# Altium PCB PCB1.PcbDoc (part 1 of 3)
Units mil, origin at the board's own origin, x right, y up, seen from the top; angles counter-clockwise.
Board outline 8343 x 1831 mil, 4 copper layers (Top Layer, VCC, GND, Bottom Layer); 375 components, 241 nets, 1575 pads, 601 vias.
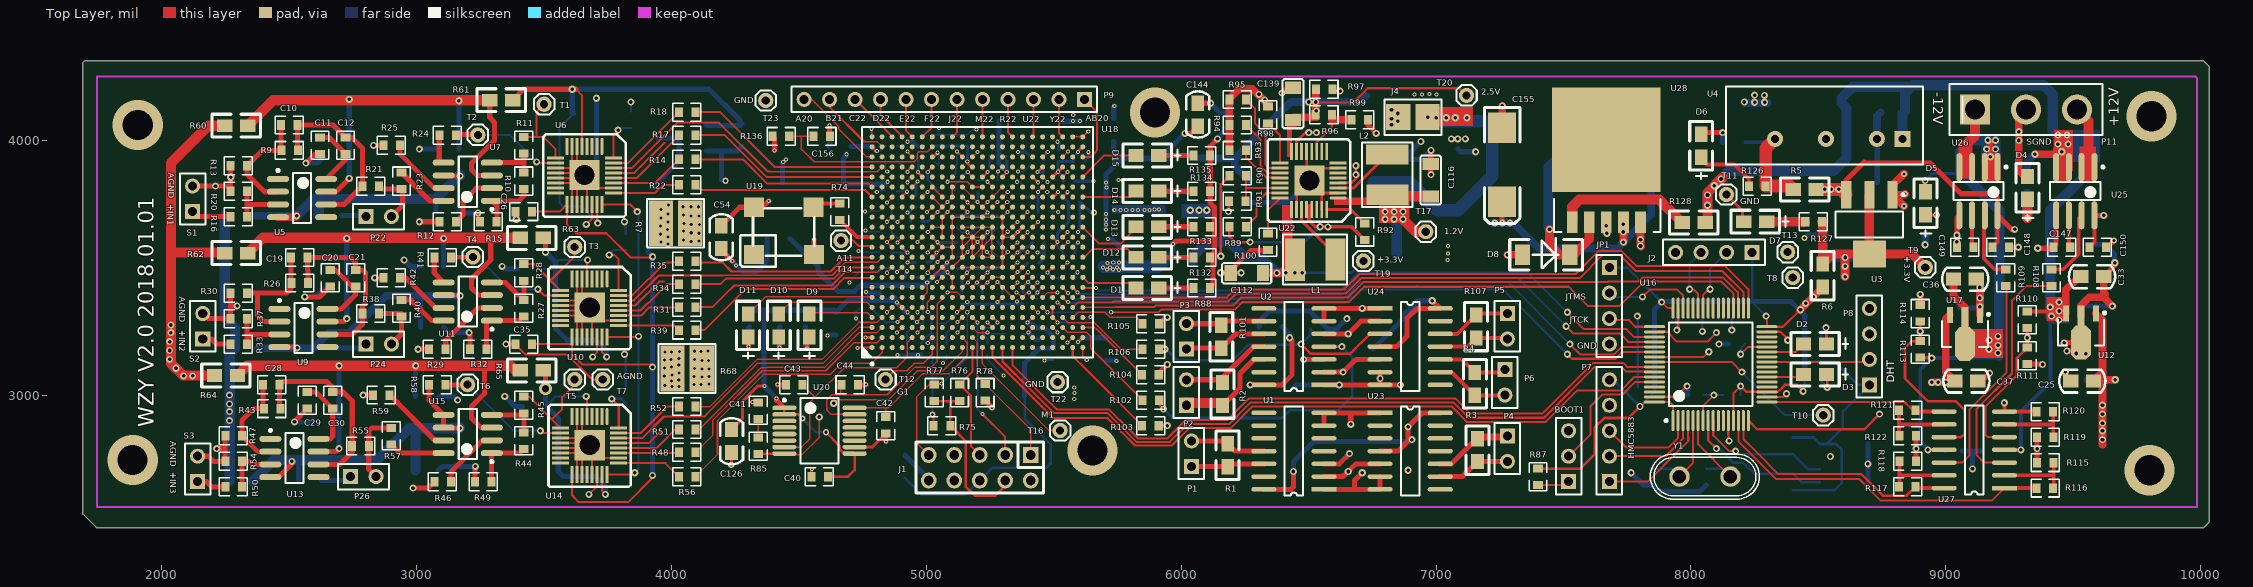
[diagram p0: Top Layer view]
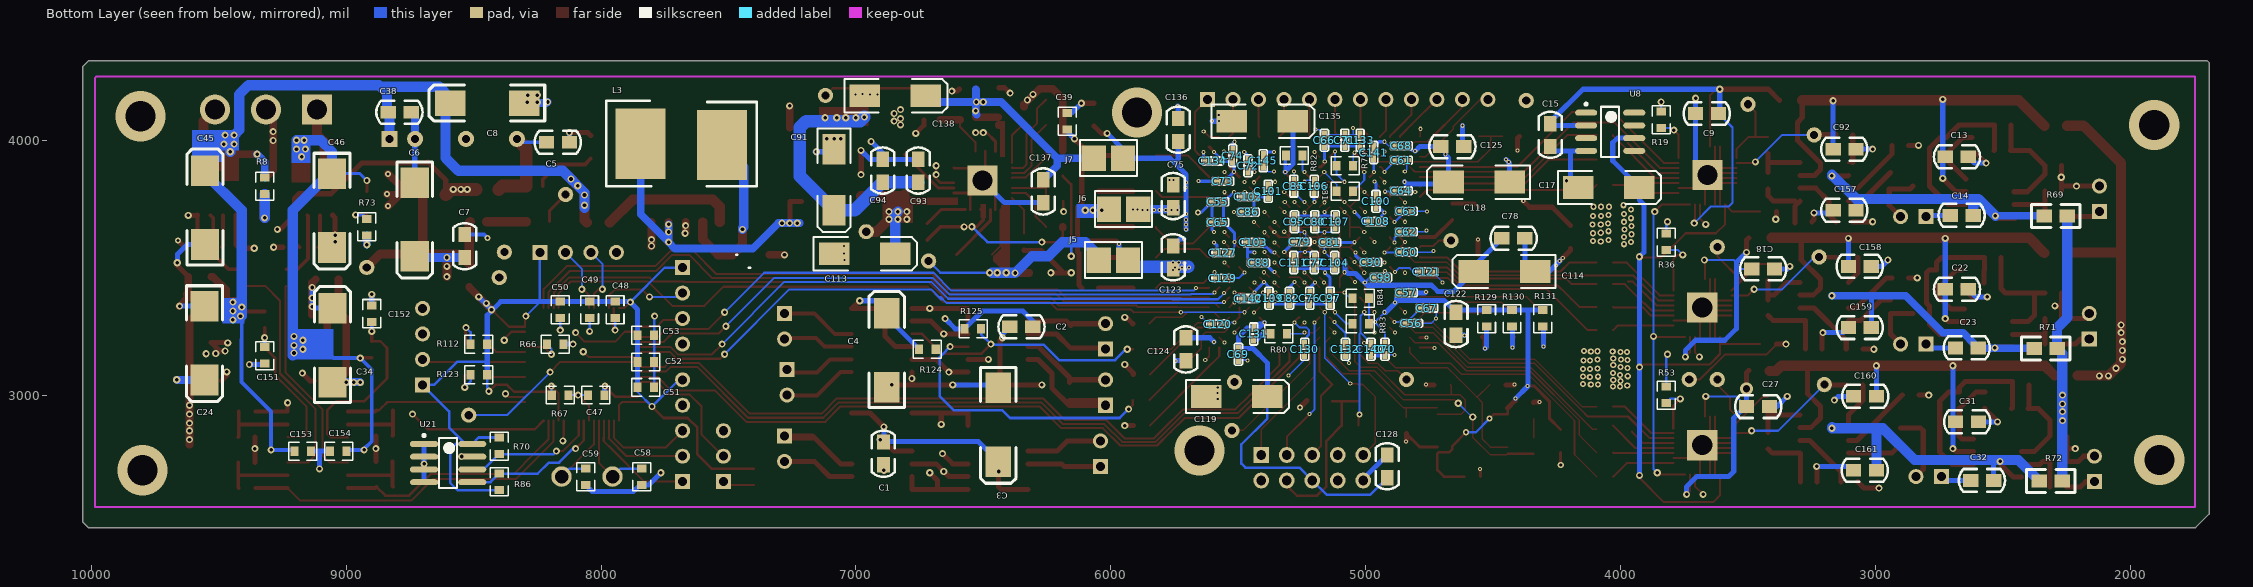
[diagram p1: Bottom Layer view, seen from below]
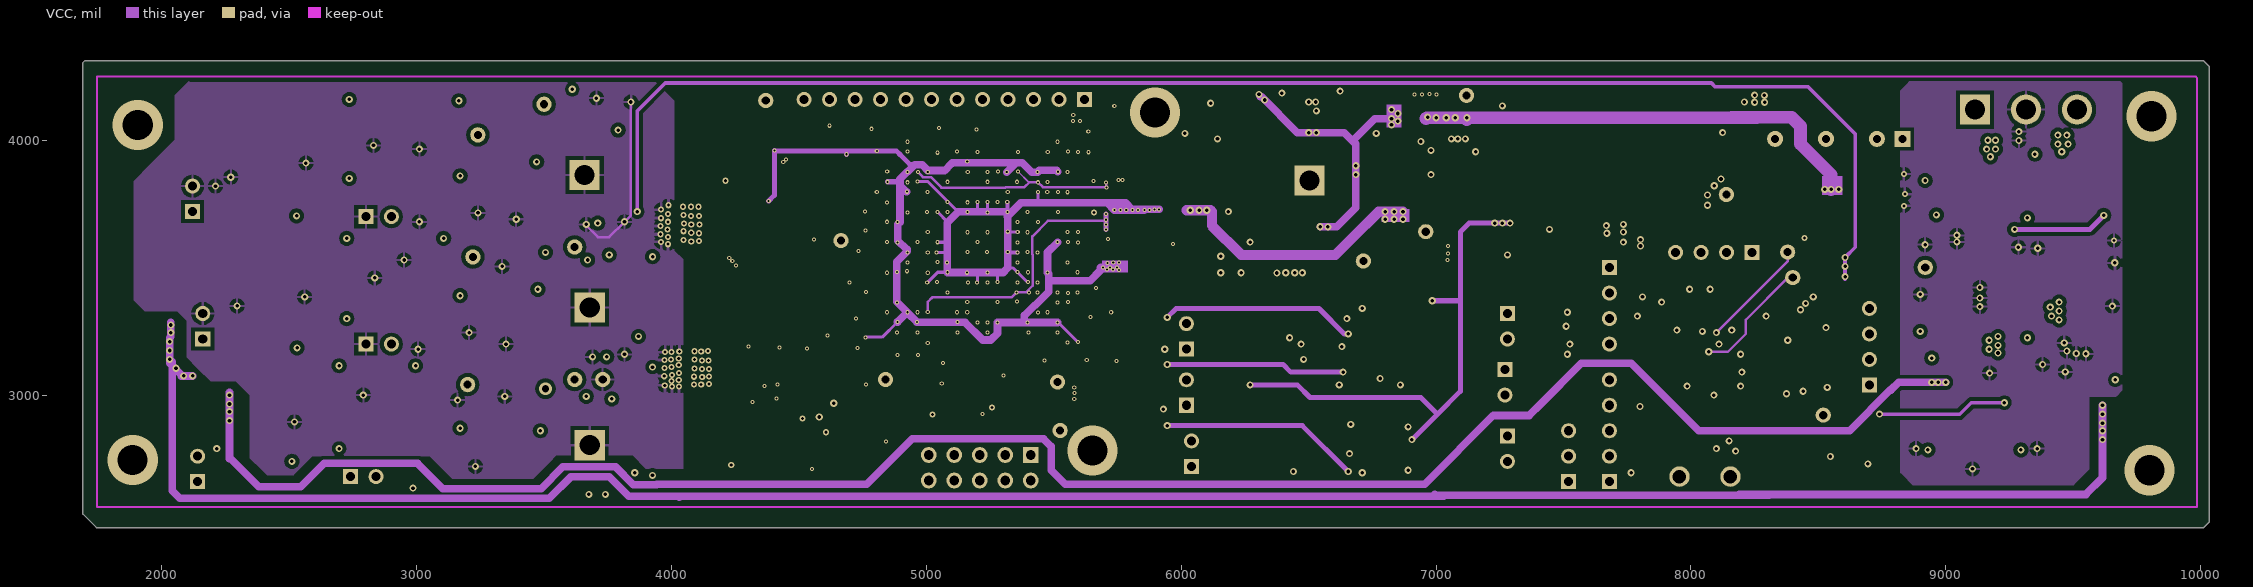
[diagram p2: VCC]
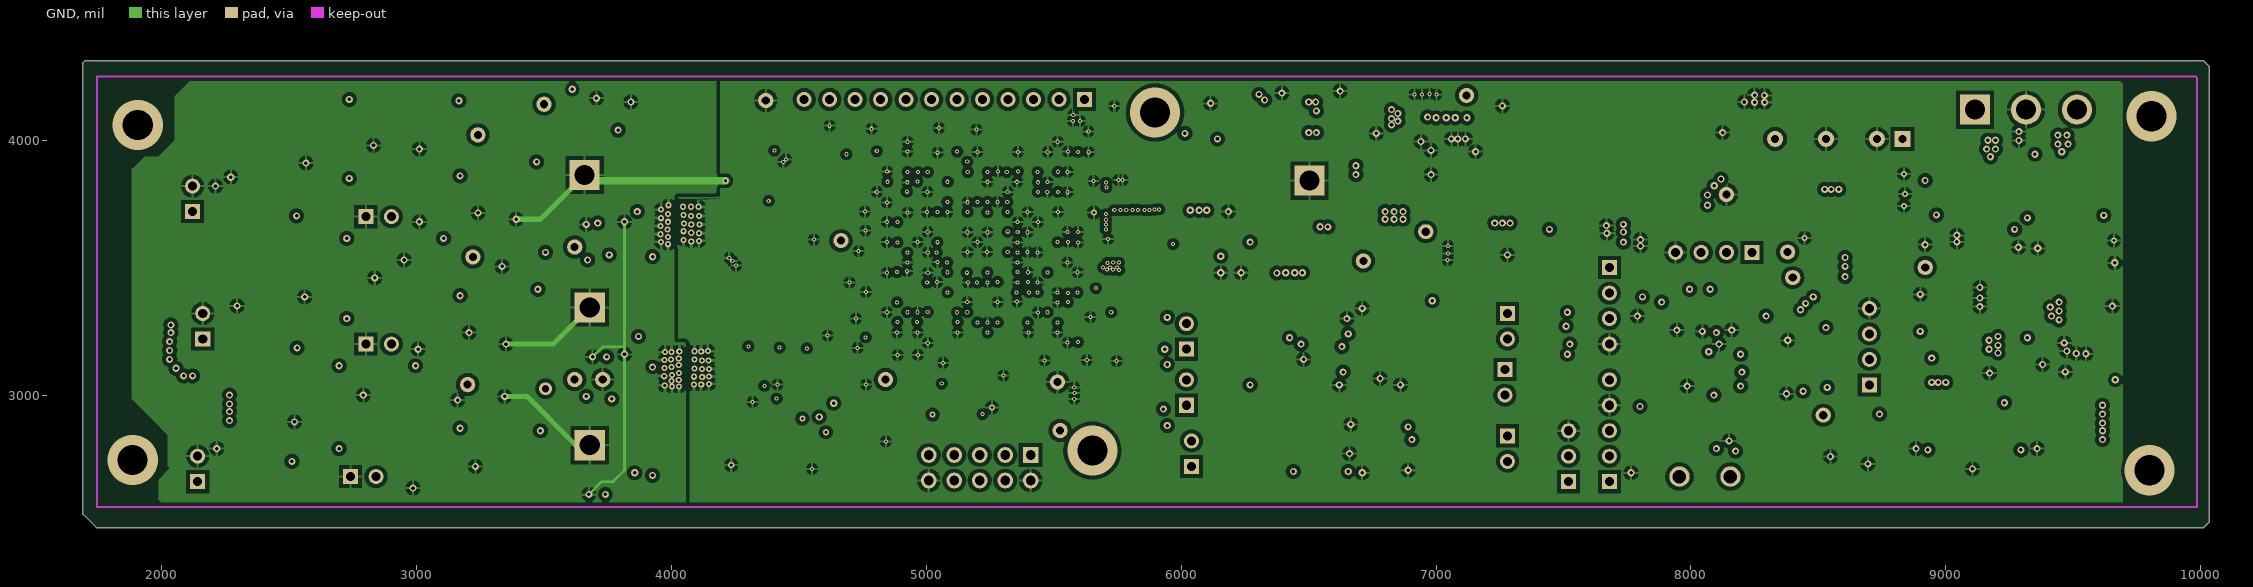
[diagram p3: GND]

## Layer stack, top to bottom
Top Layer: signal copper 1.4
Dielectric: core 12.6, FR-4, Dk 4.8
VCC: signal copper 1.4
Dielectric: prepreg 12.6, FR-4, Dk 4.8
GND: signal copper 1.4
Dielectric: core 12.6, FR-4, Dk 4.8
Bottom Layer: signal copper 1.4

## Board outline
1690,4305 1690,2533 1743,2480 2066,2480 10012,2480 10032,2500 10033,2501 10033,2694 10033,4290 10012,4311 9838,4311 1696,4311 1690,4305

## Design rules (kind name [scope] priority, off if disabled: settings)
Clearance [All] p1: gap=6
HoleToHoleClearance [All] p1 off: gap=10 allowstackedmicrovias=TRUE
MinimumSolderMaskSliver [All] p1 off: minsoldermaskwidth=10
PolygonConnect [All] p1: connectstyle=Relief reliefconductorwidth=10 reliefentries=4 polygonreliefangle="90 Angle"
RoutingVias [All] p1: holewidth=28 width=50 viastyle="Through Hole" minholewidth=8 minwidth=16 maxholewidth=28 maxwidth=50
SilkToSilkClearance [All] p1 off: silktosilkclearance=10
SilkscreenOverComponentPads [All] p1 off: minsilkscreentomaskgap=10
SolderMaskExpansion [All] p1: expansion=4
Width [All] p1: maxlimit=200 minlimit=6 preferedwidth=20 toplayer_maxwidth=100 midlayer1_prefwidth=10 midlayer2_prefwidth=10 bottomlayer_maxwidth=100
24 further rules are at their usual default settings.

## Classes and differential pairs
component class 485Driver_MAX3462: C1 C2 C3 C4 P1 P2 P3 P4 P5 P6 R1 R2 R3 R4 R101 R102 R103 R104 R105 R106 R107 R124 R125 R? U1 U2 U23 U24
component class EP3CE75F484: C39 C40 C41 C42 C43 C44 C156 D1 D9 D10 D11 D12 D13 D14 D15 J1 P9 R74 R75 R76 R77 R78 R79 R80 R81 R82 R83 R84 R85 R88 R129 R130 R131 R132 R133 R134 R135 R136 T12 T14 T16 U18 U19 U20
component class CH1_CH2: C9 C10 C11 C12 C13 C14 C15 C16 C17 C18 C19 C20 C21 C22 C23 C26 C92 C157 C158 C159 P22 P23 P24 P25 R9 R10 R11 R12 R13 R14 R15 R16 R17 R18 R19 R20 R21 R22 R23 R24 R25 R26 R27 R28 R29 R30 R31 R32 R33 R34 R35 R36 R37 R38 R39 R40 R41 R42 S1 S2 T1 T2 T3 T4 U5 U6 U7 U8 U9 U10 U11
component class CH3: C27 C28 C29 C30 C31 C32 C35 C160 C161 P26 P27 R43 R44 R45 R46 R47 R48 R49 R50 R51 R52 R53 R54 R55 R56 R57 R58 R59 S3 T5 T6 U13 U14 U15
component class Power: C5 C6 C7 C8 C24 C25 C33 C34 C36 C37 C38 C45 C46 C147 C148 C149 C150 C151 C152 C155 D4 D5 D6 D7 D8 L3 P11 R5 R6 R7 R8 R60 R61 R62 R63 R64 R65 R68 R69 R71 R72 R73 R108 R109 R110 R111 R113 R114 R126 R127 R128 T7 T9 T11 U3 U4 U12 U17 U25 U26 U28
component class STM32F103RBT6: BOOT1 C47 C48 C49 C50 C51 C52 C53 C58 C59 C153 C154 D2 D3 J2 J3 JP1 P7 P8 R66 R67 R70 R86 R87 R112 R115 R116 R117 R118 R119 R120 R121 R122 R123 T8 T10 T13 U16 U21 U27 Y1
component class FPGA_POWER: C54 C55 C56 C57 C60 C61 C62 C63 C64 C65 C66 C67 C68 C69 C70 C71 C72 C73 C74 C75 C76 C77 C78 C79 C80 C81 C82 C83 C84 C85 C86 C87 C88 C89 C90 C91 C93 C94 C95 C96 C97 C98 C99 C100 C101 C102 C103 C104 C105 C106 C107 C108 C109 C110 C111 C112 C113 C114 C115 C116 C117 C118 C119 C120 C121 C122 C123 C124 C125 C126 C127 C128 C129 C130 C131 C132 C133 C134 C135 C136 C137 C138 C139 C140 C141 C142 C143 C144 C145 C146 J4 J5 J6 J7 J? L1 L2 L? R89 R90 R91 R92 R93 R94 R95 R96 R97 R98 R99 R100 T17 T19 T20 T22 T23 T? U22 U?

## Components (designator, comment, footprint, x,y, rotation, side; value= is the part's Value field where it differs from the comment)
BOOT1 "" HDR1X3 7520,2660 r90 top
C1 "104" 0805C#1 6900,2780 r180 bottom
C2 "104" 0805C#1 6360,3260 r90 bottom
C3 "10uF" C68uF#1 6420,2880 r90 bottom
C4 "10uF" C68uF#1 6900,3180 r270 bottom
C5 "104" 0805C#1 8160,4000 r270 bottom
C6 "10uF" C68uF#2 8710,3685 r90 bottom
C7 "104" 0805C#2 8530,3585 r180 bottom
C8 "10uF" C68uF#1 8450,4125 r180 bottom
C9 "104" 0805C#2 3660,4100 r270 bottom
C10 "10pF" 0603 2500,4060 r270 top
C11 "10pF" 0603 2620,3980 r0 top
C12 "50pF" 0603 2720,3980 r0 top
C13 "104" 0805C#2 2680,3940 r90 bottom
C14 "104" 0805C#2 2660,3700 r270 bottom
C15 "106" 0805C#2 4280,4020 r0 bottom
C17 "68uF" 6032 4040,3820 r0 bottom
C18 "104" 0805C#2 3440,3500 r90 bottom
C19 "10pF" 0603 2540,3540 r270 top
C20 "10pF" 0603 2660,3460 r0 top
C21 "50pF" 0603 2760,3460 r0 top
C22 "104" 0805C#2 2680,3420 r90 bottom
C23 "104" 0805C#2 2640,3180 r270 bottom
C24 "10uF" C68uF#2 9535,3200 r90 bottom
C25 "104" 0805C#2 9535,3060 r90 top
C26 "106" 0603 3420,3720 r270 top
C27 "104" 0805C#2 3460,2960 r90 bottom
C28 "10pF" 0603 2430,3040 r270 top
C29 "10pF" 0603 2570,2980 r0 top
C30 "50pF" 0603 2670,2980 r0 top
C31 "104" 0805C#2 2640,2900 r90 bottom
C32 "104" 0805C#2 2580,2660 r270 bottom
C33 "104" 0805C#2 9575,3460 r270 top
C34 "10uF" C68uF#2 9075,3200 r270 bottom
C35 "106" 0603 3420,3200 r270 top
C36 "104" 0805C#2 9075,3460 r90 top
C37 "104" 0805C#2 9080,3060 r90 top
C38 "104" 0805C#2 8790,4105 r270 bottom
C39 "104" 0603 6170,4075 r180 bottom
C40 "104" 0603 4580,2680 r90 top
C41 "100" 0603 4340,2940 r0 top
C42 "100" 0603 4840,2880 r180 top
C43 "100" 0603 4480,3040 r90 top
C44 "100" 0603 4700,3040 r270 top
C45 "10uF" C68uF#2 9575,3740 r270 bottom
C46 "10uF" C68uF#2 9035,3720 r90 bottom
C47 "104" 0603 8020,3000 r90 bottom
C48 "104" 0603 7945,3335 r180 bottom
C49 "104" 0603 8045,3335 r180 bottom
C50 "104" 0603 8160,3335 r180 bottom
C51 "104" 0603 7825,3030 r90 bottom
C52 "104" 0603 7825,3130 r90 bottom
C53 "104" 0603 7825,3235 r90 bottom
C54 "104" 0805C#2 4200,3620 r0 top
C55 "104" 0402C 5580,3760 r180 bottom
C56 "104" 0402C 4820,3280 r0 bottom
C57 "104" 0402C 4840,3400 r0 bottom
C58 "22p" 0603 7840,2680 r180 bottom
C59 "22p" 0603 8060,2680 r180 bottom
C60 "104" 0402C 4840,3560 r0 bottom
C61 "104" 0402C 4860,3920 r0 bottom
C62 "104" 0402C 4840,3640 r0 bottom
C63 "104" 0402C 4840,3720 r0 bottom
C64 "104" 0402C 4860,3800 r0 bottom
C65 "104" 0402C 5580,3680 r180 bottom
C66 "104" 0402C 5160,4000 r270 bottom
C67 "104" 0402C 4760,3340 r0 bottom
C68 "104" 0402C 4860,3980 r180 bottom
C69 "104" 0402C 5500,3160 r90 bottom
C70 "104" 0402C 4925.25,3180 r90 bottom
C71 "104" 0402C 5080,4000 r270 bottom
C72 "104" 0402C 5460,3900 r270 bottom
C73 "104" 0402C 5560,3840 r180 bottom
C74 "104" 0402C 5520,3940 r270 bottom
C75 "104" 0805C#2 5760,3780 r0 bottom
C76 "104" 0402C 5220,3380 r90 bottom
C77 "104" 0402C 5200,3520 r270 bottom
C78 "104" 0805C#2 4420,3620 r90 bottom
C79 "104" 0402C 5257,3600 r0 bottom
C80 "104" 0402C 5200,3680 r90 bottom
C81 "104" 0402C 5140,3600 r180 bottom
C82 "104" 0402C 5300,3380 r90 bottom
C85 "104" 0402C 5280,3820 r270 bottom
C86 "104" 0402C 5460,3720 r180 bottom
C88 "104" 0402C 5420,3520 r180 bottom
C90 "104" 0402C 4980,3520 r0 bottom
C91 "68uF16V" 6032 7080,3840 r90 bottom
C92 "104" 0805C#2 3120,3960 r270 bottom
C93 "104" 0805C#2 6760,3880 r0 bottom
C94 "104" 0805C#2 6900,3880 r0 bottom
C95 "104" 0402C 5280,3680 r90 bottom
C97 "104" 0402C 5140,3380 r90 bottom
C98 "104" 0402C 4940,3460 r0 bottom
C100 "104" 0402C 4960,3760 r90 bottom
C101 "104" 0402C 5380,3800 r270 bottom
C102 "104" 0402C 5460,3780 r180 bottom
C103 "104" 0402C 5440,3600 r180 bottom
C104 "104" 0402C 5120,3520 r270 bottom
C106 "104" 0402C 5200,3820 r270 bottom
C107 "104" 0402C 5120,3680 r90 bottom
C108 "104" 0402C 4960,3680 r0 bottom
C109 "104" 0402C 5380,3380 r90 bottom
C111 "104" 0402C 5280,3520 r270 bottom
C112 "226" C226 6260,3480 r0 top
C113 "68uF16V" 6032 6960,3560 r0 bottom
C114 "68uF16V" 6032 4460,3480 r180 bottom
C116 "226" C226 6980,3840 r270 top
C118 "68uF16V" 6032 4560,3830 r180 bottom
C119 "68uF16V" 6032 5500,3000 r0 bottom
C120 "104" 0402C 5580,3280 r180 bottom
C121 "104" 0402C 4760,3482.73 r0 bottom
C122 "104" 0805C#2 4640,3280 r180 bottom
C123 "104" 0805C#2 5760,3540 r0 bottom
C124 "104" 0805C#2 5700,3180 r180 bottom
C125 "104" 0805C#2 4660,3980 r90 bottom
C126 "104" 0805C#2 4240,2820 r0 top
C127 "104" 0402C 5560,3560 r180 bottom
C128 "104" 0805C#2 4920,2720 r0 bottom
C129 "104" 0402C 5560,3460 r180 bottom
C130 "104" 0402C 5240,3180 r90 bottom
C131 "104" 0402C 5440,3240 r90 bottom
C132 "104" 0402C 5080,3180 r90 bottom
C133 "104" 0402C 5020,4000 r270 bottom
C134 "104" 0402C 5600,3920 r180 bottom
C135 "68uF16V" 6032 5400,4080 r0 bottom
C136 "104" 0805C#2 5740,4040 r0 bottom
C137 "104" 0805C#2 6260,3800 r180 bottom
C138 "68uF16V" 6032 6840,4180 r0 bottom
C139 "226" C226 6440,4140 r270 top
C140 "104" 0402C 4980,3180 r90 bottom
C141 "104" 0402C 4966.58,3951.58 r270 bottom
C142 "104" 0402C 5460,3380 r180 bottom
C144 "104" 0805C#2 6060,4100 r180 top
C145 "104" 0402C 5400,3920 r270 bottom
C147 "102" 0603 9455,3580 r90 top
C148 "104" 0603 9215,3580 r90 top
C149 "102" 0603 9075,3580 r90 top
C150 "104" 0603 9595,3580 r90 top
C151 "Cap" 0603 9320,3155 r0 bottom
C152 "Cap" 0603 8900,3320 r180 bottom
C153 "104" 0603 9170,2780 r270 bottom
C154 "104" 0603 9030,2780 r270 bottom
C155 "68uF" C68uF#2 7280,3900 r90 top
C156 "104" 0603 4590,4015 r270 top
C157 "104" 0805C#2 3120,3720 r270 bottom
C158 "104" 0805C#2 3060,3500 r270 bottom
C159 "104" 0805C#2 3060,3260 r270 bottom
C160 "104" 0805C#2 3040,3000 r90 bottom
C161 "104" 0805C#2 3040,2700 r270 bottom
D1 "LED" 0805_LED 5880,3420 r180 top
D2 "LED" 0805_LED 8500,3200 r180 top
D3 "LED" 0805_LED 8500,3080 r180 top
D4 "LED" 0805_LED 9320,3800 r90 top
D5 "LED" 0805_LED 8920,3740 r90 top
D6 "LED" 0805_LED 8040,3965 r90 top
D7 "LED" 0805_LED 8265,3680 r180 top
D8 "IN5824" 1N5824 7440,3560 r0 top
D9 "LED" 0805_LED 4540,3260 r90 top
D10 "LED" 0805_LED 4420,3260 r90 top
D11 "LED" 0805_LED 4300,3260 r90 top
D12 "LED" 0805_LED 5880,3540 r180 top
D13 "LED" 0805_LED 5880,3660 r180 top
D14 "LED" 0805_LED 5880,3800 r180 top
D15 "LED" 0805_LED 5880,3940 r180 top
J1 "JTAG" IDC10 5180,2720 r0 top
J2 "CON4" HDR1X4 8240,3560 r180 top
J4 "" I_ON1 6900,4100 r90 top
J5 "" I_ON1 5980,3520 r270 bottom
J6 "" I_ON1 5940,3720 r270 bottom
J7 "" I_ON1 6000,3920 r270 bottom
JP1 "" HDR1X4 7680,3500 r270 top
L1 "3.3uH" L3R3 6520,3540 r0 top
L2 "3.3uH" L3R3 6800,3860 r90 top
L3 "100uH" L100uH 7680,3980 r180 bottom
P1 "Header 2H" HDR1X2 6040,2720 r90 top
P2 "Header 2H" HDR1X2 6020,2960 r90 top
P3 "Header 2H" HDR1X2 6020,3180 r90 top
P4 "Header 2H" HDR1X2 7280,2840 r270 top
P5 "Header 2H" HDR1X2 7280,3320 r270 top
P6 "Header 2H" HDR1X2 7270,3100 r270 top
P7 "Header 5" HDR1X5 7680,2660 r90 top
P8 "Header 4" HDR1X4 8700,3040 r90 top
P9 "Header 12" HDR1X12 5620,4160 r180 top
P11 "POWER" SIP3-5.08mm 9115,4120 r0 top
P22 "Header 2H" HDR1X2 2800,3700 r0 top
P24 "Header 2H" HDR1X2 2800,3200 r0 top
P26 "Header 2H" HDR1X2 2740,2680 r0 top
R1 "100" 0805R#1 6180,2740 r180 top
R2 "100" 0805R#1 6160,2980 r180 top
R3 "100" 0805R#1 7160,2760 r180 top
R4 "100" 0805R#1 7150,3020 r180 top
R5 "000" 0805R#1 8470,3805 r270 top
R6 "000" 0805R#2 8520,3480 r0 top
R7 "000" I_ON 4015,3675 r0 top
R8 "Res2" 0603 9320,3820 r0 bottom
R9 "1001" 0603 2500,3960 r90 top net-tie
R10 "1001" 0603 3420,3840 r180 top net-tie
R11 "000" 0603 3420,3980 r180 top net-tie
R12 "1001" 0603 3120,3680 r90 top net-tie
R13 "10R" 0603 2300,3900 r90 top
R14 "000" 0603 4060,3925 r90 top net-tie
R15 "4.99K" 0603 3280,3680 r90 top net-tie
R16 "0R" 0603 2300,3700 r90 top
R17 "000" 0603 4060,4020 r90 top net-tie
R18 "000" 0603 4060,4110 r90 top net-tie
R19 "000" 0603 3840,4080 r0 bottom net-tie
R20 "1001" 0603 2300,3800 r90 top net-tie
R21 "825" 0603 2820,3820 r270 top net-tie
R22 "000" 0603 4060,3825 r90 top net-tie
R23 "825" 0603 2940,3840 r180 top net-tie
R24 "000" 0603 3120,4020 r90 top net-tie
R25 "100" 0603 2900,3980 r90 top net-tie
R26 "1001" 0603 2540,3440 r90 top net-tie
R27 "1001" 0603 3420,3340 r180 top net-tie
R28 "000" 0603 3420,3480 r180 top net-tie
R29 "1001" 0603 3080,3180 r90 top net-tie
R30 "10R" 0603 2300,3400 r90 top net-tie
R31 "000" 0603 4060,3345 r90 top net-tie
R32 "4.99K" 0603 3240,3180 r90 top net-tie
R33 "0R" 0603 2300,3200 r90 top net-tie
R34 "000" 0603 4060,3435 r90 top net-tie
R35 "000" 0603 4060,3525 r90 top net-tie
R36 "000" 0603 3820,3600 r0 bottom net-tie
R37 "1001" 0603 2300,3300 r90 top net-tie
R38 "825" 0603 2820,3320 r270 top net-tie
R39 "000" 0603 4060,3255 r90 top net-tie
R40 "825" 0603 2940,3340 r180 top net-tie
R41 "000" 0603 3100,3540 r90 top net-tie
R42 "100" 0603 2900,3460 r90 top net-tie
R43 "1001" 0603 2431.08,2946.98 r90 top net-tie
R44 "1001" 0603 3420,2820 r180 top net-tie
R45 "000" 0603 3420,2960 r180 top net-tie
R46 "1001" 0603 3100,2660 r90 top net-tie
R47 "10R" 0603 2280,2840 r90 top
R48 "000" 0603 4060,2775 r90 top net-tie
R49 "4.99K" 0603 3260,2660 r90 top net-tie
R50 "0R" 0603 2280,2640 r90 top
R51 "000" 0603 4060,2865 r90 top net-tie
R52 "000" 0603 4060,2955 r90 top net-tie
R53 "000" 0603 3820,3000 r0 bottom net-tie
R54 "1001" 0603 2280,2740 r90 top net-tie
R55 "825" 0603 2780,2800 r270 top net-tie
R56 "000" 0603 4060,2680 r90 top net-tie
R57 "825" 0603 2900,2840 r0 top net-tie
R58 "000" 0603 3080,3040 r90 top net-tie
R59 "100" 0603 2860,3000 r90 top net-tie
R60 "000" 0805R#2 2280,4060 r90 top
R61 "000" 0805R#2 3320,4160 r90 top
R62 "000" 0805R#2 2280,3560 r90 top
R63 "000" 0805R#2 3440,3620 r90 top
R64 "000" 0805R#2 2240,3080 r90 top
R65 "000" 0805R#2 3440,3100 r90 top
R66 "0" 0603 8180,3200 r90 bottom
R67 "10k" 0603 8160,3000 r270 bottom
R68 "000" I_ON 4060,3105 r0 top
R69 "000" 0805R#2 2280,3700 r270 bottom
R70 "4.7K" 0603 8400,2800 r0 bottom
R71 "000" 0805R#2 2320,3180 r270 bottom
R72 "000" 0805R#2 2300,2660 r270 bottom
R73 "Res2" 0603 8920,3660 r180 bottom
R74 "0" 0603 4660,3720 r0 top
R75 "0" 0603 5060,2880 r90 top
R76 "1001" 0603 5130,3010 r0 top
R77 "1001" 0603 5030,3010 r0 top
R78 "1001" 0603 5230,3010 r180 top
R79 "1002" 0603 5080,3900 r270 bottom
R80 "1002" 0603 5340,3240 r270 bottom
R81 "1002" 0603 5080,3800 r270 bottom
R82 "1002" 0603 5280,3940 r90 bottom
R83 "1002" 0603 5020,3280 r90 bottom
R84 "1002" 0603 5020,3380 r90 bottom
R85 "25R0" 0603 4340,2800 r180 top
R86 "4.7K" 0603 8400,2660 r180 bottom
R87 "10k" 0603 7400,2680 r0 top
R88 "Res2" 0603 6080,3420 r90 top
R89 "1001" 0603 6220,3660 r90 top
R90 "9102" 0603 6220,3860 r90 top
R91 "2002" 0603 6220,3760 r270 top
R92 "1001" 0603 6720,3640 r180 top
R93 "1001" 0603 6220,3960 r90 top
R94 "1001" 0603 6220,4060 r90 top
R95 "1001" 0603 6220,4160 r90 top
R96 "1503" 0603 6560,4100 r270 top
R97 "1002" 0603 6560,4200 r90 top
R98 "1001" 0603 6340,4100 r0 top
R99 "1003" 0603 6700,4080 r90 top
R100 "1001" 0603 6340,3600 r180 top
R101 "100" 0805R#2 6160,3240 r0 top
R102 "100" 0603 5880,2980 r90 top
R103 "100" 0603 5880,2880 r270 top
R104 "100" 0603 5880,3080 r270 top
R105 "100" 0603 5880,3280 r90 top
R106 "100" 0603 5880,3180 r90 top
R107 "100" 0805R#2 7160,3280 r0 top
R108 "000" 0603 9415,3460 r180 top net-tie
R109 "000" 0603 9235,3460 r180 top net-tie
R110 "Res2" 0603 9320,3295 r180 top
R111 "Res2" 0603 9320,3155 r0 top
R112 "Res2" 0603 8480,3200 r90 bottom
R113 "Res2" 0603 8900,3180 r0 top
R114 "Res2" 0603 8900,3320 r180 top
R115 "Res2" 0603 9390,2735 r90 top
R116 "Res2" 0603 9390,2635 r270 top
R117 "Res2" 0603 8850,2640 r270 top
R118 "Res2" 0603 8850,2740 r90 top
R119 "Res2" 0603 9390,2835 r90 top
R120 "Res2" 0603 9390,2935 r270 top
R121 "Res2" 0603 8850,2940 r270 top
R122 "Res2" 0603 8850,2840 r90 top
R123 "Res2" 0603 8480,3080 r90 bottom
R124 "1001" 0603 6720,3180 r90 bottom
R125 "1001" 0603 6540,3260 r270 bottom
R126 "Res2" 0603 8260,3820 r90 top
R127 "Res2" 0603 8480,3680 r90 top
R128 "000" 0805R#2 8000,3680 r90 top
R129 "Res2" 0603 4525,3300 r0 bottom
R130 "Res2" 0603 4425,3300 r0 bottom
R131 "Res2" 0603 4305,3300 r0 bottom
R132 "Res2" 0603 6080,3540 r90 top
R133 "Res2" 0603 6080,3660 r90 top
R134 "Res2" 0603 6080,3800 r90 top
R135 "Res2" 0603 6080,3940 r90 top
R136 "1002" 0603 4430,4015 r270 top
S1 "Sensor" HDR1X2 2120,3720 r90 top
S2 "Sensor" HDR1X2 2160,3220 r90 top
S3 "Sensor" HDR1X2 2140,2660 r90 top
T1 "TEST" TEST#1 3500,4140 r0 top
T2 "TEST" TEST#1 3240,4020 r0 top
T3 "TEST" TEST#1 3620,3580 r0 top
T4 "TEST" TEST#1 3220.5,3540.8 r0 top
T5 "TEST" TEST#1 3620,3060 r0 top
T6 "TEST" TEST#1 3200,3040 r0 top
T7 "AGND" TEST#2 3730,3060 r0 top
T8 "" TEST#2 8400,3460 r0 top
T9 "+3.3V" TEST#2 8920,3500 r0 top
T10 "" TEST#2 8520,2920 r0 top
T11 "GND_D" TEST#2 8139.48,3786.03 r0 top
T12 "" TEST#2 4840,3060 r0 top
T13 "" TEST#2 8380,3560 r0 top
T14 "" TEST#2 4665,3605 r0 top
T16 "" TEST#2 5525,2860 r0 top
T17 "+1.2V" TEST#2 6960,3640 r0 top
T19 "+3.3V" TEST#2 6715,3525 r0 top
T20 "+3.3V" TEST#2 7120,4175 r0 top
T22 "DGND" TEST#2 5515,3050 r0 top
T23 "DGND" TEST#2 4370,4155 r0 top
U1 "MAX3461" SOP14 6560,2630 r180 top
U2 "MAX3461" SOP14 6560,3040 r180 top
U3 "LM1117-3.3V" SOT223 8700,3670 r270 top
U4 "B1205S2W" B1205SW 8830,4005 r270 top
U5 "AD797" SO8#1 2550,3780 r270 top
U6 "AD7195" VQFN32 3640,3860 r90 top
U7 "ADA4041-1" SO8#1 3200,3830 r90 top
U8 "ADR421" SO8#1 4040,4040 r270 bottom
U9 "AD797" SO8#1 2555,3270 r270 top
U10 "AD7195" VQFN32 3660,3340 r90 top
U11 "ADA4041-1" SO8#1 3200,3360 r90 top
U12 "78L05" SOT89-M 9535,3260 r90 top
U13 "AD797" SO8#1 2520,2760 r270 top
U14 "AD7195" VQFN32 3660,2800 r90 top
U15 "ADA4041-1" SO8#1 3200,2840 r90 top
U16 "STM32F103RBT6" LQFP64_M 8080,3120 r180 top
U17 "79L05" SOT89M 9075,3240 r270 top
U18 "EP4CE75F23I7" FBGA484 5200,3600 r0 top locked
U19 "50MHz" CLOCK4 4440,3640 r270 top
U20 "EPCS64" SOP65P780-16M 4580,2860 r0 top
U21 "24LC64" SO8#2 8600,2740 r270 bottom
U22 "TPS650243RHBR" VQFN32 6500,3860 r0 top
U23 "MAX3461" SOP14 6780,2930 r0 top
U24 "MAX3461" SOP14 6780,3340 r0 top
U25 "ACS712" SO8#2 9515,3800 r180 top
U26 "ACS712" SO8#2 9135,3800 r180 top
U27 "OPA4277" SOP14 9230,2635 r180 top
U28 "LM2576-5" lm2596 7680,3900 r0 top
Y1 "" XTAL_8M 8055,2680 r180 top

## Footprints (in the part's own frame and the unit in brackets; to place one, negate y for a bottom-side part, rotate by r counter-clockwise, add the part's x,y. Pads: shape width x height; smd on the part's side, far side on the other; paste and mask are expansions set on the pad)
1N5824 [mil]
  rect 60x80 smd: 1(-101,-10) 2(84,-10)
  silkscreen extent -151,-75 134,55
0402C [mm]
  rect 0.8x0.5 smd: 1(-0.57,-0.025) 2(0.58,-0.035)
  silkscreen extent -1.09,-0.43 1.09,0.36
0603 [mm]
  rect 0.96x0.8 smd: 1(0,0.8) 2(0,-0.85)
  silkscreen extent -0.89,-1.4 0.89,1.4
0805_LED [mil]
  rect 60x50 smd: 1(-31.93,-0.36) 2(58.07,-0.36)
  silkscreen extent -117,-45 108,45
0805C#1 [mil]
  rect 50x60 smd: 1(8.08,-54) 2(8.08,36)
  silkscreen extent -37,-101 53,81
0805C#2 [mil]
  rect 50x60 smd: 1(-4.94,-45.08) 2(-4.94,44.92)
  silkscreen extent -50,-92 40,90
0805R#1 [mil]
  rect 50x60 smd: 1(-1.98,21.08) 2(-1.98,-68.92)
  silkscreen extent -47,-119 43,71
0805R#2 [mil]
  rect 50x60 smd: 1(-3.02,-56.08) 2(-3.02,33.92)
  silkscreen extent -48,-106 42,84
6032 [mil]
  rect 120x90 smd: 1(-114.57,5.36) 2(125.43,5.36)
  silkscreen extent -200,-60 205,70
B1205SW [mm]
  rect 1.6x1.6 hole 0.8: 1(0,0)
  round 1.6 hole 0.8: 2(0,-2.54) 4(0,-7.62) 6(0,-12.7)
  silkscreen extent -5.21,-17.6 2.54,2.03
C68uF#1 [mil]
  rect 120x100 smd: 1(-141,21) 2(149,21)
  silkscreen extent -226,-49 229,91
C68uF#2 [mil]
  rect 120x110.24 smd: 1(-141,21) 2(149,21)
  silkscreen extent -226,-49 229,91
C226 [mm]
  rect 1.2x1.6 smd: 1(1.524,-0.025) 2(-1.676,-0.025)
  silkscreen extent -2.54,-1.07 2.36,0.99
CLOCK4 [mm]
  rect 1.905x2 smd: 1(2.263,-2.962) 2(2.263,3.007) 3(-2.461,2.981) 4(-2.461,-2.988)
  silkscreen extent -2.39,-4.34 3.45,3.03
FBGA484 [mm]
  round 0.5 smd: A1(-10.5,-10.5) A2(-10.5,-9.5) A3(-10.5,-8.5) A4(-10.5,-7.5) A5(-10.5,-6.5) A6(-10.5,-5.5) A7(-10.5,-4.5) A8(-10.5,-3.5) A9(-10.5,-2.5) A10(-10.5,-1.5) A11(-10.5,-0.5) A12(-10.5,0.5) A13(-10.5,1.5) A14(-10.5,2.5) A15(-10.5,3.5) A16(-10.5,4.5) A17(-10.5,5.5) A18(-10.5,6.5) A19(-10.5,7.5) A20(-10.5,8.5) A21(-10.5,9.5) A22(-10.5,10.5) AA1(9.5,-10.5) AA2(9.5,-9.5) AA3(9.5,-8.5) AA4(9.5,-7.5) AA5(9.5,-6.5) AA6(9.5,-5.5) AA7(9.5,-4.5) AA8(9.5,-3.5) AA9(9.5,-2.5) AA10(9.5,-1.5) AA11(9.5,-0.5) AA12(9.5,0.5) AA13(9.5,1.5) AA14(9.5,2.5) AA15(9.5,3.5) AA16(9.5,4.5) AA17(9.5,5.5) AA18(9.5,6.5) AA19(9.5,7.5) AA20(9.5,8.5) AA21(9.5,9.5) AA22(9.5,10.5) AB1(10.5,-10.5) AB2(10.5,-9.5) AB3(10.5,-8.5) AB4(10.5,-7.5) AB5(10.5,-6.5) AB6(10.5,-5.5) AB7(10.5,-4.5) AB8(10.5,-3.5) AB9(10.5,-2.5) AB10(10.5,-1.5) AB11(10.5,-0.5) AB12(10.5,0.5) AB13(10.5,1.5) AB14(10.5,2.5) AB15(10.5,3.5) AB16(10.5,4.5) AB17(10.5,5.5) AB18(10.5,6.5) AB19(10.5,7.5) AB20(10.5,8.5) AB21(10.5,9.5) AB22(10.5,10.5) B1(-9.5,-10.5) B2(-9.5,-9.5) B3(-9.5,-8.5) B4(-9.5,-7.5) B5(-9.5,-6.5) B6(-9.5,-5.5) B7(-9.5,-4.5) B8(-9.5,-3.5) B9(-9.5,-2.5) B10(-9.5,-1.5) B11(-9.5,-0.5) B12(-9.5,0.5) B13(-9.5,1.5) B14(-9.5,2.5) B15(-9.5,3.5) B16(-9.5,4.5) B17(-9.5,5.5) B18(-9.5,6.5) B19(-9.5,7.5) B20(-9.5,8.5) B21(-9.5,9.5) B22(-9.5,10.5) C1(-8.5,-10.5) C2(-8.5,-9.5) C3(-8.5,-8.5) C4(-8.5,-7.5) C5(-8.5,-6.5) C6(-8.5,-5.5) C7(-8.5,-4.5) C8(-8.5,-3.5) C9(-8.5,-2.5) C10(-8.5,-1.5) C11(-8.5,-0.5) C12(-8.5,0.5) C13(-8.5,1.5) C14(-8.5,2.5) C15(-8.5,3.5) C16(-8.5,4.5) C17(-8.5,5.5) C18(-8.5,6.5) C19(-8.5,7.5) C20(-8.5,8.5) C21(-8.5,9.5) C22(-8.5,10.5) D1(-7.5,-10.5) D2(-7.5,-9.5) D3(-7.5,-8.5) D4(-7.5,-7.5) D5(-7.5,-6.5) D6(-7.5,-5.5) D7(-7.5,-4.5) D8(-7.5,-3.5) D9(-7.5,-2.5) D10(-7.5,-1.5) D11(-7.5,-0.5) D12(-7.5,0.5) D13(-7.5,1.5) D14(-7.5,2.5) D15(-7.5,3.5) D16(-7.5,4.5) D17(-7.5,5.5) D18(-7.5,6.5) D19(-7.5,7.5) D20(-7.5,8.5) D21(-7.5,9.5) D22(-7.5,10.5) E1(-6.5,-10.5) E2(-6.5,-9.5) E3(-6.5,-8.5) E4(-6.5,-7.5) E5(-6.5,-6.5) E6(-6.5,-5.5) E7(-6.5,-4.5) E8(-6.5,-3.5) E9(-6.5,-2.5) E10(-6.5,-1.5) E11(-6.5,-0.5) E12(-6.5,0.5) E13(-6.5,1.5) E14(-6.5,2.5) E15(-6.5,3.5) E16(-6.5,4.5) E17(-6.5,5.5) E18(-6.5,6.5) E19(-6.5,7.5) E20(-6.5,8.5) E21(-6.5,9.5) E22(-6.5,10.5) F1(-5.5,-10.5) F2(-5.5,-9.5) F3(-5.5,-8.5) F4(-5.5,-7.5) F5(-5.5,-6.5) F6(-5.5,-5.5) F7(-5.5,-4.5) F8(-5.5,-3.5) F9(-5.5,-2.5) F10(-5.5,-1.5) F11(-5.5,-0.5) F12(-5.5,0.5) F13(-5.5,1.5) F14(-5.5,2.5) F15(-5.5,3.5) F16(-5.5,4.5) F17(-5.5,5.5) F18(-5.5,6.5) F19(-5.5,7.5) F20(-5.5,8.5) F21(-5.5,9.5) F22(-5.5,10.5) G1(-4.5,-10.5) G2(-4.5,-9.5) G3(-4.5,-8.5) G4(-4.5,-7.5) G5(-4.5,-6.5) G6(-4.5,-5.5) G7(-4.5,-4.5) G8(-4.5,-3.5) G9(-4.5,-2.5) G10(-4.5,-1.5) G11(-4.5,-0.5) G12(-4.5,0.5) G13(-4.5,1.5) G14(-4.5,2.5) G15(-4.5,3.5) G16(-4.5,4.5) G17(-4.5,5.5) G18(-4.5,6.5) G19(-4.5,7.5) G20(-4.5,8.5) G21(-4.5,9.5) G22(-4.5,10.5) H1(-3.5,-10.5) H2(-3.5,-9.5) H3(-3.5,-8.5) H4(-3.5,-7.5) H5(-3.5,-6.5) H6(-3.5,-5.5) H7(-3.5,-4.5) H8(-3.5,-3.5) H9(-3.5,-2.5) H10(-3.5,-1.5) H11(-3.5,-0.5) H12(-3.5,0.5) H13(-3.5,1.5) H14(-3.5,2.5) H15(-3.5,3.5) H16(-3.5,4.5) H17(-3.5,5.5) H18(-3.5,6.5) H19(-3.5,7.5) H20(-3.5,8.5) H21(-3.5,9.5) H22(-3.5,10.5) J1(-2.5,-10.5) J2(-2.5,-9.5) J3(-2.5,-8.5) J4(-2.5,-7.5) J5(-2.5,-6.5) J6(-2.5,-5.5) J7(-2.5,-4.5) J8(-2.5,-3.5) J9(-2.5,-2.5) J10(-2.5,-1.5) J11(-2.5,-0.5) J12(-2.5,0.5) J13(-2.5,1.5) J14(-2.5,2.5) J15(-2.5,3.5) J16(-2.5,4.5) J17(-2.5,5.5) J18(-2.5,6.5) J19(-2.5,7.5) J20(-2.5,8.5) J21(-2.5,9.5) J22(-2.5,10.5) K1(-1.5,-10.5) K2(-1.5,-9.5) K3(-1.5,-8.5) K4(-1.5,-7.5) K5(-1.5,-6.5) K6(-1.5,-5.5) K7(-1.5,-4.5) K8(-1.5,-3.5) K9(-1.5,-2.5) K10(-1.5,-1.5) K11(-1.5,-0.5) K12(-1.5,0.5) K13(-1.5,1.5) K14(-1.5,2.5) K15(-1.5,3.5) K16(-1.5,4.5) K17(-1.5,5.5) K18(-1.5,6.5) K19(-1.5,7.5) K20(-1.5,8.5) K21(-1.5,9.5) K22(-1.5,10.5) L1(-0.5,-10.5) L2(-0.5,-9.5) L3(-0.5,-8.5) L4(-0.5,-7.5) L5(-0.5,-6.5) L6(-0.5,-5.5) L7(-0.5,-4.5) L8(-0.5,-3.5) L9(-0.5,-2.5) L10(-0.5,-1.5) L11(-0.5,-0.5) L12(-0.5,0.5) L13(-0.5,1.5) L14(-0.5,2.5) L15(-0.5,3.5) L16(-0.5,4.5) L17(-0.5,5.5) L18(-0.5,6.5) L19(-0.5,7.5) L20(-0.5,8.5) L21(-0.5,9.5) L22(-0.5,10.5) M1(0.5,-10.5) M2(0.5,-9.5) M3(0.5,-8.5) M4(0.5,-7.5) M5(0.5,-6.5) M6(0.5,-5.5) M7(0.5,-4.5) M8(0.5,-3.5) M9(0.5,-2.5) M10(0.5,-1.5) M11(0.5,-0.5) M12(0.5,0.5) M13(0.5,1.5) M14(0.5,2.5) M15(0.5,3.5) M16(0.5,4.5) M17(0.5,5.5) M18(0.5,6.5) M19(0.5,7.5) M20(0.5,8.5) M21(0.5,9.5) M22(0.5,10.5) N1(1.5,-10.5) N2(1.5,-9.5) N3(1.5,-8.5) N4(1.5,-7.5) N5(1.5,-6.5) N6(1.5,-5.5) N7(1.5,-4.5) N8(1.5,-3.5) N9(1.5,-2.5) N10(1.5,-1.5) N11(1.5,-0.5) N12(1.5,0.5) N13(1.5,1.5) N14(1.5,2.5) N15(1.5,3.5) N16(1.5,4.5) N17(1.5,5.5) N18(1.5,6.5) N19(1.5,7.5) N20(1.5,8.5) N21(1.5,9.5) N22(1.5,10.5) P1(2.5,-10.5) P2(2.5,-9.5) P3(2.5,-8.5) P4(2.5,-7.5) P5(2.5,-6.5) P6(2.5,-5.5) P7(2.5,-4.5) P8(2.5,-3.5) P9(2.5,-2.5) P10(2.5,-1.5) P11(2.5,-0.5) P12(2.5,0.5) P13(2.5,1.5) P14(2.5,2.5) P15(2.5,3.5) P16(2.5,4.5) P17(2.5,5.5) P18(2.5,6.5) P19(2.5,7.5) P20(2.5,8.5) P21(2.5,9.5) P22(2.5,10.5) R1(3.5,-10.5) R2(3.5,-9.5) R3(3.5,-8.5) R4(3.5,-7.5) R5(3.5,-6.5) R6(3.5,-5.5) R7(3.5,-4.5) R8(3.5,-3.5) R9(3.5,-2.5) R10(3.5,-1.5) R11(3.5,-0.5) R12(3.5,0.5) R13(3.5,1.5) R14(3.5,2.5) R15(3.5,3.5) R16(3.5,4.5) R17(3.5,5.5) R18(3.5,6.5) R19(3.5,7.5) R20(3.5,8.5) R21(3.5,9.5) R22(3.5,10.5) T1(4.5,-10.5) T2(4.5,-9.5) T3(4.5,-8.5) T4(4.5,-7.5) T5(4.5,-6.5) T6(4.5,-5.5) T7(4.5,-4.5) T8(4.5,-3.5) T9(4.5,-2.5) T10(4.5,-1.5) T11(4.5,-0.5) T12(4.5,0.5) T13(4.5,1.5) T14(4.5,2.5) T15(4.5,3.5) T16(4.5,4.5) T17(4.5,5.5) T18(4.5,6.5) T19(4.5,7.5) T20(4.5,8.5) T21(4.5,9.5) T22(4.5,10.5) U1(5.5,-10.5) U2(5.5,-9.5) U3(5.5,-8.5) U4(5.5,-7.5) U5(5.5,-6.5) U6(5.5,-5.5) U7(5.5,-4.5) U8(5.5,-3.5) U9(5.5,-2.5) U10(5.5,-1.5) U11(5.5,-0.5) U12(5.5,0.5) U13(5.5,1.5) U14(5.5,2.5) U15(5.5,3.5) U16(5.5,4.5) U17(5.5,5.5) U18(5.5,6.5) U19(5.5,7.5) U20(5.5,8.5) U21(5.5,9.5) U22(5.5,10.5) V1(6.5,-10.5) V2(6.5,-9.5) V3(6.5,-8.5) V4(6.5,-7.5) V5(6.5,-6.5) V6(6.5,-5.5) V7(6.5,-4.5) V8(6.5,-3.5) V9(6.5,-2.5) V10(6.5,-1.5) V11(6.5,-0.5) V12(6.5,0.5) V13(6.5,1.5) V14(6.5,2.5) V15(6.5,3.5) V16(6.5,4.5) V17(6.5,5.5) V18(6.5,6.5) V19(6.5,7.5) V20(6.5,8.5) V21(6.5,9.5) V22(6.5,10.5) W1(7.5,-10.5) W2(7.5,-9.5) W3(7.5,-8.5) W4(7.5,-7.5) W5(7.5,-6.5) W6(7.5,-5.5) W7(7.5,-4.5) W8(7.5,-3.5) W9(7.5,-2.5) W10(7.5,-1.5) W11(7.5,-0.5) W12(7.5,0.5) W13(7.5,1.5) W14(7.5,2.5) W15(7.5,3.5) W16(7.5,4.5) W17(7.5,5.5) W18(7.5,6.5) W19(7.5,7.5) W20(7.5,8.5) W21(7.5,9.5) W22(7.5,10.5) Y1(8.5,-10.5) Y2(8.5,-9.5) Y3(8.5,-8.5) Y4(8.5,-7.5) Y5(8.5,-6.5) Y6(8.5,-5.5) Y7(8.5,-4.5) Y8(8.5,-3.5) Y9(8.5,-2.5) Y10(8.5,-1.5) Y11(8.5,-0.5) Y12(8.5,0.5) Y13(8.5,1.5) Y14(8.5,2.5) Y15(8.5,3.5) Y16(8.5,4.5) Y17(8.5,5.5) Y18(8.5,6.5) Y19(8.5,7.5) Y20(8.5,8.5) Y21(8.5,9.5) Y22(8.5,10.5)
  silkscreen extent -11.5,-12.27 11.5,11.5, body extent -11.5,-11.5 11.5,11.5, height 2.6
HDR1X2 [mm] "Connector; Header; 2 Position"
  rect 1.5x1.5 hole 0.9: 1(0,0)
  round 1.5 hole 0.9: 2(2.54,0)
  silkscreen extent -1.27,-1.27 3.81,1.27
HDR1X3 [mm] "Connector; Header; 3 Position"
  rect 1.5x1.5 hole 0.9: 1(0,0)
  round 1.5 hole 0.9: 2(2.54,0) 3(5.08,0)
  silkscreen extent -1.27,-1.27 6.35,1.27
HDR1X4 [mm] "Connector; Header; 4 Position"
  rect 1.5x1.5 hole 0.9: 1(0,0)
  round 1.5 hole 0.9: 2(2.54,0) 3(5.08,0) 4(7.62,0)
  silkscreen extent -1.27,-1.27 8.89,1.27
HDR1X5 [mm] "Connector; Header; 5 Position"
  rect 1.5x1.5 hole 0.9: 1(0,0)
  round 1.5 hole 0.9: 2(2.54,0) 3(5.08,0) 4(7.62,0) 5(10.16,0)
  silkscreen extent -1.27,-1.27 11.43,1.27
HDR1X12 [mm] "Connector; Header; 12 Position"
  rect 1.5x1.5 hole 0.9: 1(0,0)
  round 1.5 hole 0.9: 2(2.54,0) 3(5.08,0) 4(7.62,0) 5(10.16,0) 6(12.7,0) 7(15.24,0) 8(17.78,0) 9(20.32,0) 10(22.86,0) 11(25.4,0) 12(27.94,0)
  silkscreen extent -1.27,-1.27 29.21,1.27
I_ON [mil]
  rect 95x180 smd: 1(-56.67,-0.77) 2(58.29,-0.77)
  silkscreen extent -111,-97 112,95
I_ON1 [mil]
  rect 101.26x95 smd: 1(-9.23,-66.67) 2(-9.23,48.29)
  silkscreen extent -80,-121 60,102
IDC10 [mil]
  rect 62x62 hole 38: 1(229,45)
  round 62 hole 38: 2(229,-55) 3(129,45) 4(129,-55) 5(29,45) 6(29,-55) 7(-71,45) 8(-71,-55) 9(-171,45) 10(-171,-55)
  silkscreen extent -221,-105 279,95
L3R3 [mm]
  rect 2x4.2 smd: 1(2.142,-0.213) 2(-1.878,-0.223)
  silkscreen extent -3.08,-2.7 3.32,2.3
L100uH [mm]
  rect 5x7 smd: 1(3.912,0.025) 2(-4.184,0.152)
  silkscreen extent -7.59,-4.06 7.39,4.45
lm2596 [mm]
  rect 10.8x10.41 smd: 0(-0.301,2.587)
  rect 1.07x2.15 smd: 1(-3.701,-5.613) 2(-2.001,-5.613) 3(-0.301,-5.613) 4(1.399,-5.613) 5(3.099,-5.613)
  silkscreen extent -5.5,-6.61 5.1,-3.31
LQFP64_M [mm]
  oval 0.3x2.1 smd: 1(3.81,5.588) 2(3.31,5.588) 3(2.81,5.588) 4(2.31,5.588) 5(1.81,5.588) 6(1.31,5.588) 7(0.81,5.588) 8(0.31,5.588) 9(-0.19,5.588) 10(-0.69,5.588) 11(-1.19,5.588) 12(-1.69,5.588) 13(-2.19,5.588) 14(-2.69,5.588) 15(-3.19,5.588) 16(-3.69,5.588) 33(-3.69,-5.612) 34(-3.19,-5.612) 35(-2.69,-5.612) 36(-2.19,-5.612) 37(-1.69,-5.612) 38(-1.19,-5.612) 39(-0.69,-5.612) 40(-0.19,-5.612) 41(0.31,-5.612) 42(0.81,-5.612) 43(1.31,-5.612) 44(1.81,-5.612) 45(2.31,-5.612) 46(2.81,-5.612) 47(3.31,-5.612) 48(3.81,-5.612)
  oval 2.1x0.3 smd: 17(-5.54,3.738) 18(-5.54,3.238) 19(-5.54,2.738) 20(-5.54,2.238) 21(-5.54,1.738) 22(-5.54,1.238) 23(-5.54,0.738) 24(-5.54,0.238) 25(-5.54,-0.262) 26(-5.54,-0.762) 27(-5.54,-1.262) 28(-5.54,-1.762) 29(-5.54,-2.262) 30(-5.54,-2.762) 31(-5.54,-3.262) 32(-5.54,-3.762) 49(5.66,-3.762) 50(5.66,-3.262) 51(5.66,-2.762) 52(5.66,-2.262) 53(5.66,-1.762) 54(5.66,-1.262) 55(5.66,-0.762) 56(5.66,-0.262) 57(5.66,0.238) 58(5.66,0.738) 59(5.66,1.238) 60(5.66,1.738) 61(5.66,2.238) 62(5.66,2.738) 63(5.66,3.238) 64(5.66,3.738)
  silkscreen extent -4.09,-4.16 4.63,5.71
SIP3-5.08mm [mm]
  rect 3x3 hole 2: 1(0,0)
  round 3 hole 2: 2(5.08,0) 3(10.16,0)
  silkscreen extent -2.54,-2.54 12.7,2.54
SO8#1 [mm]
  oval 0.6x2.2 smd: 1(-1.727,-2.4) 2(-0.457,-2.4) 3(0.813,-2.4) 4(2.083,-2.4) 5(2.083,2.4) 6(0.813,2.4) 7(-0.457,2.4) 8(-1.727,2.4)
  silkscreen extent -2.7,-2.52 2.68,0.9, body extent -2.32,-2 2.68,2, height 1.7
SO8#2 [mm]
  oval 0.6x2.8 smd: 1(-1.727,-2.4) 2(-0.457,-2.4) 3(0.813,-2.4) 4(2.083,-2.4) 5(2.083,2.4) 6(0.813,2.4) 7(-0.457,2.4) 8(-1.727,2.4)
  silkscreen extent -2.7,-2.53 2.68,0.9, body extent -2.32,-2 2.68,2, height 1.7
SOP14 [mm]
  rect 2.5x0.45 smd: 1(0,0)
  oval 2.5x0.45 smd: 2(0,-1.27) 3(0,-2.54) 4(0,-3.81) 5(0,-5.08) 6(0,-6.35) 7(0,-7.62) 8(6,-7.62) 9(6,-6.35) 10(6,-5.08) 11(6,-3.81) 12(6,-2.54) 13(6,-1.27) 14(6,0)
  silkscreen extent 2.08,-8.25 3.92,0.64
SOP65P780-16M [mm] "SOP, 16-Leads, Body 6.2x5.3mm, Pitch 0.65mm, IPC Low Density"
  oval 2.4x0.45 smd: 1(-3.5,2.275) 2(-3.5,1.625) 3(-3.5,0.975) 4(-3.5,0.325) 5(-3.5,-0.325) 6(-3.5,-0.975) 7(-3.5,-1.625) 8(-3.5,-2.275) 9(3.5,-2.275) 10(3.5,-1.625) 11(3.5,-0.975) 12(3.5,-0.325) 13(3.5,0.325) 14(3.5,0.975) 15(3.5,1.625) 16(3.5,2.275)
  silkscreen extent -3.62,-3.25 1.9,3.25, body extent -2.7,-3.25 2.7,3.25, height 2
SOT89-M [mm]
  rect 1.6x0.6 smd: 1(1.519,-1.373) 3(1.519,1.627)
  oct 3.4x2 smd: 2(-1.381,0.127)
  rect 2x0.7 smd: 2(1.319,0.127)
  silkscreen extent -1.68,-2.35 1.69,2.43, body extent -1.68,-2.17 0.92,2.43, height 1.6
SOT89M [mm] "SOT89, 3-Leads, Body 4.5x2.4 mm, Pitch 1.5mm, Lead Span 4.1mm, IPC Low Density"
  rect 1.6x0.6 smd: 1(-1.9,1.5) 3(-1.9,-1.5)
  rect 2x0.7 smd: 2(-1.7,0)
  oct 3.4x2 smd: 2(1,0)
  silkscreen extent -2.07,-2.3 1.3,2.48, body extent -1.3,-2.3 1.3,2.3, height 1.6
SOT223 [mm]
  rect 2.7x1 smd: 1(-2.95,2.3) 2(-2.95,0) 3(-2.95,-2.3)
  rect 2.7x3.3 smd: 4(2.95,0)
  silkscreen extent -3.07,-3.35 1.3,3.48, body extent -1.85,-3.35 1.85,3.35, height 1.7
TEST#1 [mil]
  round 60 hole 32: 1(-0.52,1.03)
  silkscreen extent -41,-39 39,41
TEST#2 [mil]
  oval 60x59.06 hole 32: 1(-0.52,1.03)
  silkscreen extent -41,-39 39,41
VQFN32 [mm]
  oval 1.7x0.28 smd: 1(2.94,-2.203)
  rect 1.7x0.28 smd: 2(2.94,-1.703) 3(2.94,-1.203) 4(2.94,-0.703) 5(2.94,-0.203) 6(2.94,0.297) 7(2.94,0.797) 8(2.94,1.297) 17(-2.85,1.297) 18(-2.85,0.797) 19(-2.85,0.297) 20(-2.85,-0.203) 21(-2.85,-0.703) 22(-2.85,-1.203) 23(-2.85,-1.703) 24(-2.85,-2.203)
  rect 0.28x1.7 smd: 9(1.795,2.447) 10(1.295,2.447) 11(0.795,2.447) 12(0.295,2.447) 13(-0.205,2.447) 14(-0.705,2.447) 15(-1.205,2.447) 16(-1.705,2.447) 25(-1.705,-3.353) 26(-1.205,-3.353) 27(-0.705,-3.353) 28(-0.205,-3.353) 29(0.295,-3.353) 30(0.795,-3.353) 31(1.295,-3.353) 32(1.795,-3.353)
  rect 3x3 hole 2: 33(0.082,-0.475)
  silkscreen extent -4.08,-4.57 4.13,3.64
XTAL_8M [mil]
  round 80 hole 53: 1(-100.02,-0.17) 2(99.98,-0.17)
  silkscreen extent -214,-89 215,88

## Part data
BOOT1: library part CON3, "Connector"
C1 C2 C5 C7 C9 C10 C11 C12 C13 C14 C15 C18 C19 C20 C21 C22 C23 C25 C26 C27 C28 C29 C30 C31 C32 C33 C35 C36 C37 C38 C92 C147 C148 C149 C150 C153 C154 C157 C158 C159 C160 C161: library part Cap, "Capacitor"
C3 C4 C6 C8 C17 C24 C34 C45 C46: library part "Cap Pol2", "Polarized Capacitor (Axial)"
C39 C47 C48 C49 C50 C51 C52 C53 C54 C55 C56 C57 C58 C59 C60 C61 C62 C63 C64 C65 C66 C67 C68 C69 C70 C71 C72 C73 C74 C75 C76 C77 C78 C79 C80 C81 C82 C85 C86 C88 C90 C93 C94 C95 C97 C98 C100 C101 C102 C103 C104 C106 C107 C108 C109 C111 C112 C116 C120 C121 C122 C123 C124 C125 C126 C127 C128 C129 C130 C131 C132 C133 C134 C136 C137 C139 C140 C141 C142 C144 C145: library part CAP, "Capacitor"
C40 C41 C42 C43 C44 C156: library part C
C91 C113 C114 C118 C119 C135 C138 C155: library part "CAPACITOR POL", "Capacitor"
C151 C152: "Capacitor"
D8: library part DIODE, "Diode"
J1: library part "HEADER 5X2"
J2: "Connector"
J4 J5 J6 J7: library part I_ON
JP1: library part CON4, "Connector"
L1 L2: library part L
L3: library part INDUCTOR
P1 P2 P3 P4 P5 P6 P22 P24 P26: "Header, 2-Pin, Right Angle"
P7: "Header, 5-Pin"
P8: "Header, 4-Pin"
P9: "Header, 12-Pin"
P11: library part "Header 3", "Header, 3-Pin"
R1 R2 R3 R4 R5 R6 R7 R9 R10 R11 R12 R13 R14 R15 R16 R17 R18 R19 R20 R21 R22 R23 R24 R25 R26 R27 R28 R29 R30 R31 R32 R33 R34 R35 R36 R37 R38 R39 R40 R41 R42 R43 R44 R45 R46 R47 R48 R49 R50 R51 R52 R53 R54 R55 R56 R57 R58 R59 R60 R61 R62 R63 R64 R65 R68 R69 R71 R72 R101 R102 R103 R104 R105 R106 R107 R108 R109 R124 R125 R128: library part Res2, "Resistor"
R8 R73 R88 R110 R111 R112 R113 R114 R115 R116 R117 R118 R119 R120 R121 R122 R123 R126 R127 R129 R130 R131 R132 R133 R134 R135: "Resistor"
R66 R70 R86: library part Res1, "Resistor"
R67 R87: library part res1, "Resistor"
R74 R75 R76 R77 R78 R79 R80 R81 R82 R83 R84 R85 R89 R90 R91 R92 R93 R94 R95 R96 R97 R98 R99 R100 R136: library part RES2
T7 T8 T9 T10 T11 T12 T13 T14 T16 T17 T19 T20 T22 T23: library part TEST
U16: "STM32 ARM-based 32-bit MCU with 128 Kbytes Flash, 64-pin LQFP, Industrial Temperature"
U18: "Cyclone IV Family FPGA, 2V Core, 292 I/O Pins, 4 PLLs, 484-Pin FBGA, Speed Grade 7, Industrial Grade"
U19: library part OSC
U21: library part 24C02
U22: library part TPS650243
U28: library part LM2596-5
Y1: library part XTAL, "Crystal Oscillator"

## Via types
v1: diameter 28, hole 14, Top Layer to Bottom Layer, 286 vias
v2: diameter 16, hole 8, Top Layer to Bottom Layer, 238 vias
v3: diameter 24, hole 12, Top Layer to Bottom Layer, 70 vias
v4: diameter 196.85, hole 118.11, Top Layer to Bottom Layer, 6 vias
v5: diameter 50, hole 28, Top Layer to Bottom Layer, 1 vias

## Nets (pads, with @x,y where several pads share a name; then routed paths per layer and width w, separated by ;. In a path a pad name is that pad's centre, name@x,y a point inside that pad or via, vN(x,y) a via of type N, cw(c..) or ccw(c..) an arc to the next point about the centre after c; other vN are vias at no path point)
3V3: C48.1 C49.1 C50.1 C51.1 C52.1 C53.1 J2.1 JP1.1 P7.5 P8.1 R6.1 R67.2 R70.2 R86.2 R87.1 R112.2 R123.2 U16.1 U16.13 U16.19 U16.32 U16.48 U16.64 U21.8 | length 4839.8
  Top Layer w8: v1(7800,2955) 7817.61,2972.61 U16.64@7857.17,2972.61 ; U16.64@7857.17,2972.84 7917.16,2972.84 7929.78,2960.22 U16.1@7929.78,2900 ; v1(7885,3365) 7909.05,3340.95 U16.48@7929.78,3340.95 ; U16.13@8166.22,2900 8166.22,3006.22 v1(8195,3035) ; v1@8298.11,3308.11 U16.32@8298.11,3268.11 8361.17,3268.11 v1@8426.53,3333.47
  Top Layer w10: R87.1@7400,2711.5 7566.5,2711.5 7622,2767 7622,2872 7660,2910 7755,2910 v1(7800,2955) ; v1(8195,3035) 8217.79,3012.21 U16.19@8298.11,3012.21 8340.6,3012.21 8368.39,3040 8415,3040 v1(8440,3015)
  Top Layer w30: v1@8426.53,3333.47 R6.1@8516.98,3423.92
  Bottom Layer w8: v1(7800,2955) 7856.5,3011.5 C51.1@7856.5,3030 ; R67.2@8193.46,3000 8195,3001.54 v1(8195,3035) ; 8238.5,3366.5 v1(8295,3310)
  Bottom Layer w10: P7.5@7680,3060 7695,3060 v1(7800,2955) ; JP1.1@7680,3500 7750,3500 v1(7885,3365) ; 8238.5,3366.5 8240,3367.99 J2.1@8240,3560 ; R86.2@8400,2626.54 8562.54,2626.54 8592,2656 8592,2786 8570,2808 U21.8@8532,2808 ; R70.2@8400,2833.46 8480.05,2833.46 U21.8@8505.51,2808 U21.8@8532,2808 ; v1(8440,3015) 8446.54,3021.54 R123.2@8446.54,3080 ; 8446.54,3130 8565,3130 8655,3040 P8.1@8700,3040 8596,2936 8596,2872 U21.8@8532,2808
  Bottom Layer w20: C51.1@7856.5,3030 C52.1@7856.5,3130 C53.1@7856.5,3235 7856.5,3336.5 v1(7885,3365) 7886.5,3366.5 C48.1@7945,3366.5 C49.1@8045,3366.5 C50.1@8160,3366.5 8238.5,3366.5 8393.5,3366.5 8446.54,3313.46 R112.2@8446.54,3200 8446.54,3130 R123.2@8446.54,3080 ; v1(8430,3335) v1(8480,3385)
  other v1: 8450,3360
+1.2V: C75.2 C76.2 C77.2 C78.2 C79.2 C80.2 C81.2 C82.2 C85.2 C86.2 C88.2 C90.2 C95.2 C97.2 C98.2 C100.2 C101.2 C102.2 C103.2 C104.2 C106.2 C107.2 C108.2 C109.2 C111.2 C114.1 J6.2 U18.E17 U18.F6 U18.G8 U18.G10 U18.G12 U18.G14 U18.G16 U18.H9 U18.H11 U18.H15 U18.J7 U18.J8 U18.J10 U18.J11 U18.J12 U18.J13 U18.J14 U18.J16 U18.J17 U18.K8 U18.K9 U18.K14 U18.K15 U18.K17 U18.L7 U18.L9 U18.L14 U18.L16 U18.M8 U18.M9 U18.M14 U18.M15 U18.N7 U18.N9 U18.N14 U18.N16 U18.P7 U18.P9 U18.P10 U18.P11 U18.P12 U18.P13 U18.P14 U18.P15 U18.P17 U18.R6 U18.R8 U18.R10 U18.R12 U18.R15 U18.T7 U18.T9 U18.T11 U18.T13 U18.U6 U18.U8 U18.V7 U18.V17 | length 8315.7
  Top Layer w6: U18.E17@4944.09,3816.54 4944.54,3816.54 4965,3837 v2(4964,3838) ; U18.F6@4983.46,3383.46 5003.01,3403.01 v2(5003,3441) ; U18.G8@5022.83,3462.2 U18.H9@5062.2,3501.57 ; U18.G10@5022.83,3540.94 U18.H11@5062.2,3580.32 ; U18.G12@5022.83,3619.69 v2(5042.76,3599.76) U18.H11@5062.2,3580.32 ; U18.G14@5022.83,3698.43 v2(5043.2,3718.8) U18.H15@5062.2,3737.8 ; U18.G16@5022.83,3777.17 U18.H15@5062.2,3737.8 ; U18.J7@5101.57,3422.83 U18.J8@5101.57,3462.2 v2(5081.89,3481.89) U18.H9@5062.2,3501.57 ; U18.J17@5101.57,3816.54 U18.J16@5101.57,3777.17 v2(5082.2,3757.8) U18.H15@5062.2,3737.8 ; U18.K8@5140.94,3462.2 v2(5158.87,3480.13) U18.L9@5180.31,3501.57 ; U18.K9@5140.94,3501.57 U18.L9@5180.31,3501.57 ; U18.K15@5140.94,3737.8 5159.74,3719 v2(5161,3719) 5161,3718.48 U18.K14@5140.94,3698.43 ; U18.K17@5140.94,3816.54 U18.L16@5180.31,3777.17 U18.M15@5219.69,3737.8 ; U18.L7@5180.31,3422.83 v2(5198.74,3441.26) U18.M8@5219.69,3462.2 v2(5239.24,3481.76) U18.N9@5259.06,3501.57 ; U18.N7@5259.06,3422.83 5259.06,3424.06 v2(5279,3444) 5298.43,3424.57 U18.P7@5298.43,3422.83 U18.R6@5337.8,3383.46 ; U18.P15@5298.43,3737.8 5298.43,3739.43 v2(5317,3758) ; U18.P17@5298.43,3816.54 U18.N16@5259.06,3777.17 v2(5239.94,3758.05) U18.M15@5219.69,3737.8 ; v2(5319,3561) 5319,3560 5317.48,3560 U18.P10@5298.43,3540.94 ; v2(5319,3641) 5319,3640 5318.74,3640 U18.P12@5298.43,3619.69 ; U18.R8@5337.8,3462.2 v2(5357.8,3482.2) U18.T9@5377.17,3501.57 ; U18.R10@5337.8,3540.94 v2(5356.93,3560.07) U18.T11@5377.17,3580.32 ; U18.R12@5337.8,3619.69 U18.P12@5298.43,3619.69 ; U18.R15@5337.8,3737.8 v2(5318,3718) U18.P14@5298.43,3698.43 ; U18.T7@5377.17,3422.83 v2(5397.67,3443.33) U18.U8@5416.54,3462.2 ; U18.U6@5416.54,3383.46 v2(5436.04,3402.96) U18.V7@5455.91,3422.83 ; v2(5437,3797) 5437,3797.63 U18.V17@5455.91,3816.54 ; U18.H9@5062.2,3501.57 v2(5081.31,3520.68) U18.J10@5101.57,3540.94 U18.J11@5101.57,3580.32 ; U18.H11@5062.2,3580.32 U18.J11@5101.57,3580.32 ; U18.J11@5101.57,3580.32 U18.J12@5101.57,3619.69 U18.J13@5101.57,3659.06 U18.J14@5101.57,3698.43 U18.K14@5140.94,3698.43 ; U18.K14@5140.94,3698.43 U18.L14@5180.31,3698.43 U18.M14@5219.69,3698.43 ; U18.L9@5180.31,3501.57 U18.M9@5219.69,3501.57 U18.N9@5259.06,3501.57 ; U18.M14@5219.69,3698.43 5238.26,3717 v2(5239,3717) 5239,3718.48 U18.M15@5219.69,3737.8 ; U18.M14@5219.69,3698.43 U18.N14@5259.06,3698.43 U18.P14@5298.43,3698.43 ; U18.N9@5259.06,3501.57 U18.P9@5298.43,3501.57 U18.P10@5298.43,3540.94 ; U18.P10@5298.43,3540.94 U18.P11@5298.43,3580.32 U18.P12@5298.43,3619.69 ; U18.P12@5298.43,3619.69 U18.P13@5298.43,3659.06 U18.P14@5298.43,3698.43
  Top Layer w12: U18.R12@5337.8,3619.69 U18.T13@5377.17,3659.06
  VCC w6: v2(4964,3838) 5002,3838 v2(5082.2,3757.8) 5121,3719 5124,3719 ; v2(5043.2,3718.8) 5043.2,3715.57 5081.89,3676.89 ; 5046.89,3481.89 5006,3441 v2(5003,3441) 5043.89,3481.89 v2(5081.89,3481.89) ; v2(5239.94,3758.05) 5239.94,3719.05 v2@5240,3719 ; v2(5279,3444) 5279,3480 5280,3481 ; v2(5437,3797) 5437,3757 5440,3754
  VCC w10: v2(5042.76,3599.76) 5081.65,3599.76 5081.89,3600
  VCC w12: v2(4964,3838) 5005,3838 5124,3719 ; v2(5003,3441) 5043.89,3481.89 v2(5081.89,3481.89) 5046.89,3481.89 ; v2(5040,3560) 5080.89,3560 5081.89,3559 ; v2(5042.76,3599.76) 5081.65,3599.76 ; v2(5043.2,3718.8) 5081.89,3680.11 5081.89,3676.89 ; v2(5198.74,3441.26) 5200,3442.52 5200,3481 ; v2(5200,3758) 5200,3720 5201,3719 ; v2(5239,3717) 5239.94,3717.95 v2(5239.94,3758.05) ; 5276,3481 5279,3478 v2(5279,3444) ; 5319,3499 5340,3499 v2@5396.67,3442.33 ; v2(5319,3641) 5320,3640 v2(5358.11,3640) ; 5437,3757 v2(5437,3797)
  VCC w15: v2(5161,3719) 5185,3719 5317,3719 v2(5318,3718) ; v2(5317,3758) 5318,3757 v2(5318,3718) ; v2(5356.93,3560.07) 5319.93,3560.07 5318,3562 5318,3701 v2(5318,3718)
  VCC w30: 5318,3701 5371,3754 5781,3754 5806,3729 v2(5913,3729) ; 5709,3754 v2(5737,3726) v2(5855,3726) ; v2(5081.89,3481.89) 5082.78,3481 5301,3481 5319,3499 5319,3717 5317,3719 v2(5161,3719) 5124,3719 5081.89,3676.89 v2(5081.89,3481.89)
  Bottom Layer w6: C104.2@5121.39,3497.17 5161,3497.17 C77.2@5201.39,3497.17 ; v2(5239.94,3758.05) 5242.28,3758.05 C85.2@5281.39,3797.17 ; C101.2@5381.39,3777.17 5435.73,3777.17 C102.2@5437.17,3778.61
  Bottom Layer w12: C100.2@4958.61,3782.83 4958.61,3832.61 v2(4964,3838) ; C98.2@4962.83,3461.39 4982.61,3461.39 v2(5003,3441) ; C108.2@4982.83,3681.39 5005.8,3681.39 v2(5043.2,3718.8) ; C90.2@5002.83,3521.39 5012.39,3521.39 5040,3549 v2(5040,3560) ; v2(5042.76,3599.76) 5043.91,3598.61 C81.2@5117.17,3598.61 ; C107.2@5118.61,3702.83 5159,3702.83 ; C104.2@5121.39,3497.17 5239,3497.17 ; C97.2@5138.61,3402.83 5138.61,3459.87 v2(5158.87,3480.13) 5158.87,3495.04 5161,3497.17 ; v2(5161,3719) 5159,3717 5159,3702.83 ; v2(5198.74,3441.26) 5218.61,3421.39 C76.2@5218.61,3402.83 ; v2(5200,3758) 5201.39,3759.39 C106.2@5201.39,3797.17 ; v2(5239,3717) 5239,3702.83 ; v2(5239.24,3481.76) 5239,3482 5239,3497.17 ; C95.2@5278.61,3702.83 5239,3702.83 ; v2(5279,3444) 5298.61,3424.39 C82.2@5298.61,3402.83 ; C79.2@5279.83,3601.39 5319,3562.23 v2(5319,3561) ; C111.2@5281.39,3497.17 5239,3497.17 ; v2(5356.93,3560.07) 5367.79,3560.07 5388.72,3581 5399.56,3581 C103.2@5417.17,3598.61 ; v2(5357.8,3482.2) 5360.76,3482.2 C88.2@5397.17,3518.61 ; C109.2@5378.61,3402.83 5378.61,3424.28 v2(5397.67,3443.33) 5436.04,3404.96 v2(5436.04,3402.96) ; C101.2@5381.39,3777.17 C102.2@5435.73,3777.17 ; v2(5437,3797) 5437.17,3796.83 5437.17,3752 ; C86.2@5437.17,3718.61 5437.17,3752 ; C102.2@5437.17,3778.61 5437.17,3752 ; 5159,3702.83 5239,3702.83
  Bottom Layer w20: C78.2@4464.92,3615.06 4574.57,3505.41 C114.1@4574.57,3485.36 4652.94,3407 4717,3407 4741,3431 4993,3431 v2(5003,3441) 5039,3477 5069,3477 5081.31,3489.32 v2(5081.31,3520.68)
  other v2: 5761,3726 5784,3726 5875,3726 5808,3727 5830,3727 5895,3728
+2.5V: C136.2 C140.2 C141.2 C142.2 C144.2 C145.2 J7.2 R75.1 U18.F18 U18.G6 U18.T6 U18.U18 | length 3587.7
  Top Layer w6: v2(5005,3326) 5003.99,3327.01 5003.99,3364.62 U18.G6@5022.83,3383.46 ; v2(5354,3403) 5355,3403 5374.54,3383.46 U18.T6@5377.17,3383.46 5397.7,3404 5402,3404 5402.45,3403.55 v2(5402.45,3403.2)
  Top Layer w8: v3(5024,2923) 5028.5,2918.5 R75.1@5028.5,2880
  Top Layer w10: v2(4966,3875) 4966,3873.37 U18.F18@4983.46,3855.91 ; U18.U18@5416.54,3855.91 5417.09,3855.91 v2(5438,3835)
  Top Layer w20: v1(6014,4027) 6036.86,4027 C144.2@6064.94,4055.08
  VCC w6: v2(5359,3877) 5401,3835 5403.26,3835
  VCC w10: v2(4966,3875) 4986,3855 5018,3855 5059,3814 5309.13,3814 5311.13,3816 5384.26,3816 5403.26,3835 v2(5438,3835) 5457,3816 5597,3816 5598,3815 5697,3815 ; v2(5005,3326) 5005,3366 5020,3381 5023,3384 5335,3384 v2(5354,3403) 5390,3403 5417,3430 5417,3551.13 5416,3552.13 5416,3623 5477,3684 5638,3684 ; 5657,3684 5638,3684 ; v2@5706,3683 5705,3684 5638,3684 ; v2@5706,3834 v2(5706,3815) 5697,3815 ; v2@5709,3815 5697,3815
  VCC w20: v2(5704,3649) v2(5704,3710) 5704,3685 v2@5705,3684
  GND w10: v2@5004,3326 v2(5005,3326)
  Bottom Layer w6: v2(5359,3877) 5381.23,3877 C145.2@5401.39,3897.17 ; v2(5402.45,3403.2) 5427.04,3378.61 C142.2@5437.17,3378.61
  Bottom Layer w8: C140.2@4978.61,3202.83 4978.61,3204.06 5019,3244.46 ; v2(5005,3326) 5019,3312 5019,3244.46 ; v3(5024,2923) 5024,3239.46 5019,3244.46
  Bottom Layer w10: v2(4966,3875) 4967.98,3876.98 C141.2@4967.98,3928.75
  Bottom Layer w20: v2@5703,3650 5704,3651 5704,3683 5704,3866 5737.5,3899.5 5750,3912 ; C136.2@5735.06,3995.08 5735.06,3926.94 5750,3912 ; v1(6014,4027) 5951.71,3964.71 J7.2@5951.71,3929.23 5767.23,3929.23 5750,3912
  other v2: 5704,3669 5704,3688 5705,3834